# EAGLE board Glint module (rev A) - panelized 1x2 (EAGLE 6.4)
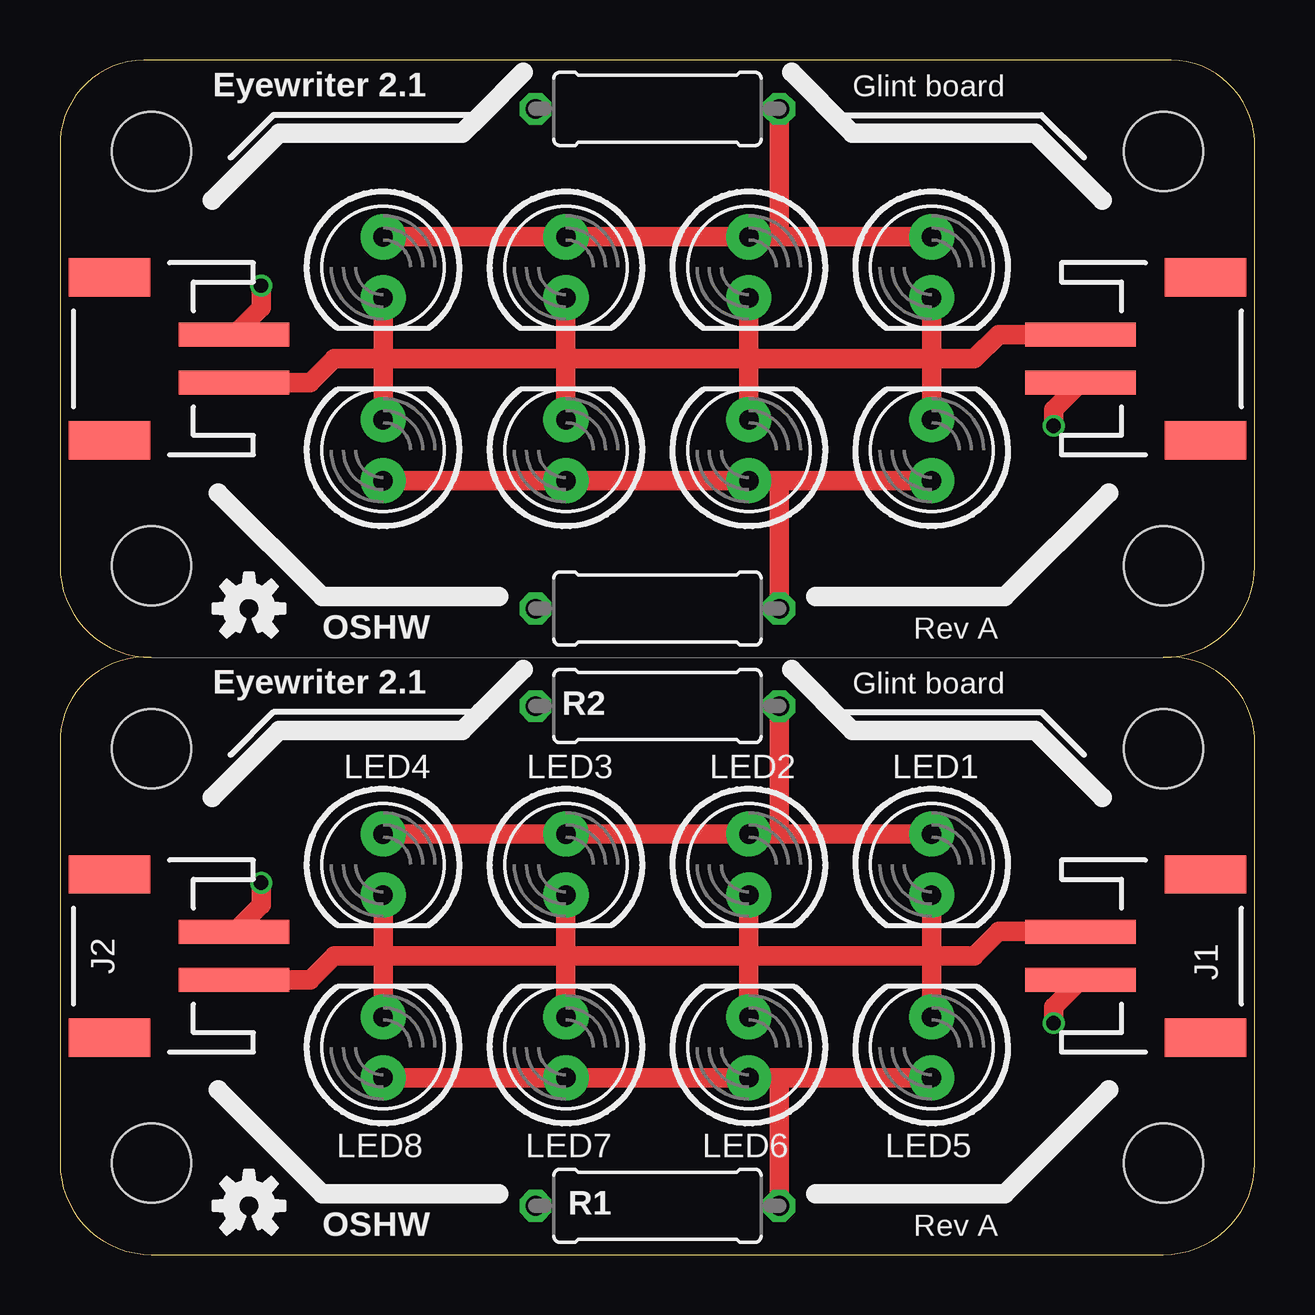
[diagram p0: board, top side]
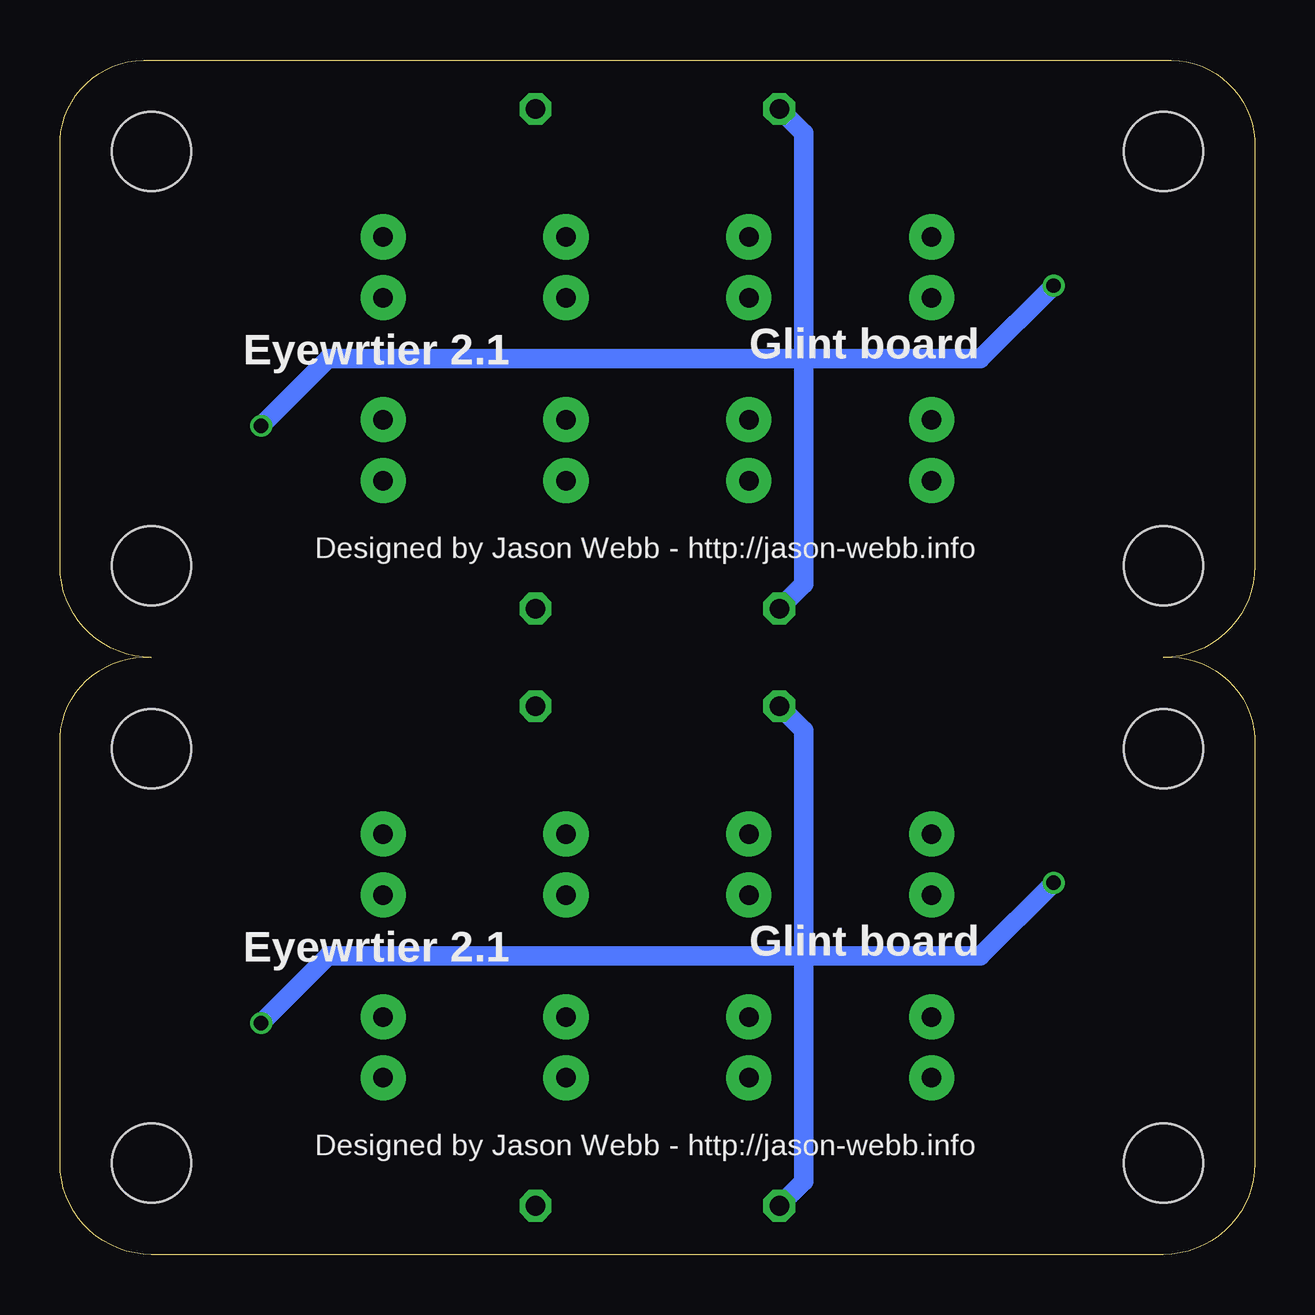
[diagram p1: board, bottom side, seen from below]

Size 49.78 x 49.79 mm. Coordinates in mm from the lower left corner, seen from the top.
Outline: 3.81,0 45.97,0 arc90 49.78,3.81 49.78,21.59 arc90 45.97,24.89 arc90 49.78,28.7 49.78,46.48 arc90 45.97,49.78 3.81,49.78 arc90 0,46.48 0,28.7 arc90 3.81,24.89 arc90 0,21.59 0,3.81 arc90 3.81,0
Copper layers (1*16): Top 0.035mm / dielectric 1.5mm / Bottom 0.035mm
Design rules "Fusion_eagle_rule_v1.1": minimum track width 6mil, minimum drill 12mil, track to track 6mil, track to pad 6mil, pad to pad 6mil, via to via 6mil, smd to smd 0mil, copper to edge 10mil, drill to drill 10mil, minimum pad ring 10mil, minimum via ring 6mil, stop-mask expansion 2mil, vias tented up to drill 100mil, thermal gap 10mil

## Footprints (pad centres in the part's own frame; a part is rotated, then mirrored left to right if it is on the bottom)
JST-2-SMD = smd 1 x 4.6: 1 -1,-3.7; 2 1,-3.7 | smd 1.6 x 3.4: NC1 -3.4,1.5; NC2 3.4,1.5
LED5MM = drill 0.813 pad 1.88: A -1.27,0; K 1.27,0
0309/10 = drill 0.813 octagon: 1 -5.08,0; 2 5.08,0
STAND-OFF = hole 3.302: 0,0

## Placement (x,y rotation side)
J1  [JST-2-SMD]  46.23,12.45 270 top
J2  [JST-2-SMD]  3.56,12.45 90 top
J3  [JST-2-SMD]  46.23,37.34 270 top
J4  [JST-2-SMD]  3.56,37.34 90 top
LED1  [LED5MM]  36.32,16.26 270 top
LED2  [LED5MM]  28.7,16.26 270 top
LED3  [LED5MM]  21.08,16.26 270 top
LED4  [LED5MM]  13.46,16.26 270 top
LED5  [LED5MM]  36.32,8.64 90 top
LED6  [LED5MM]  28.7,8.64 90 top
LED7  [LED5MM]  21.08,8.64 90 top
LED8  [LED5MM]  13.46,8.64 90 top
LED9  [LED5MM]  36.32,41.15 270 top
LED10  [LED5MM]  28.7,41.15 270 top
LED11  [LED5MM]  21.08,41.15 270 top
LED12  [LED5MM]  13.46,41.15 270 top
LED13  [LED5MM]  36.32,33.53 90 top
LED14  [LED5MM]  28.7,33.53 90 top
LED15  [LED5MM]  21.08,33.53 90 top
LED16  [LED5MM]  13.46,33.53 90 top
R1  39ohm  [0309/10]  24.89,2.03 180 top
R2  39ohm  [0309/10]  24.89,22.86 180 top
R3  39ohm  [0309/10]  24.89,26.92 180 top
R4  39ohm  [0309/10]  24.89,47.75 180 top
STANDOFF1  STAND-OFF  [STAND-OFF]  3.81,3.81 0 top
STANDOFF2  STAND-OFF  [STAND-OFF]  3.81,21.08 0 top
STANDOFF3  STAND-OFF  [STAND-OFF]  45.97,3.81 0 top
STANDOFF4  STAND-OFF  [STAND-OFF]  45.97,21.08 0 top
STANDOFF5  STAND-OFF  [STAND-OFF]  3.81,28.7 0 top
STANDOFF6  STAND-OFF  [STAND-OFF]  3.81,45.97 0 top
STANDOFF7  STAND-OFF  [STAND-OFF]  45.97,28.7 0 top
STANDOFF8  STAND-OFF  [STAND-OFF]  45.97,45.97 0 top
U$1  [OSHW-LOGO-S]  7.87,2.03 0 top
U$2  [OSHW-LOGO-S]  7.87,26.92 0 top

## Library data of the parts
J1-J4 = SparkFun-Connectors; PROD_ID: CONN-08352
LED1-LED16 = SparkFun-LED
R1-R4 = resistor
STANDOFF1-STANDOFF8 = SparkFun-Electromechanical
U$1 U$2 = SparkFun-Aesthetics

## Nets
+5V: J1.2 J2.2 R1.2 R2.2
+5V1: J3.2 J4.2 R3.2 R4.2
GND: J1.1 J2.1 LED1.K LED2.K LED3.K LED4.K LED5.K LED6.K LED7.K LED8.K
GND1: J3.1 J4.1 LED9.K LED10.K LED11.K LED12.K LED13.K LED14.K LED15.K LED16.K
N$1: LED1.A LED2.A LED3.A LED4.A R2.1
N$2: LED9.A LED10.A LED11.A LED12.A R4.1
N$3: LED5.A LED6.A LED7.A LED8.A R1.1
N$4: LED13.A LED14.A LED15.A LED16.A R3.1

## Tracks (layer width: path | path; a pad name or v marks a point on that pad's centre or on a via)
+5V  (via drill 0.6)
  Top 0.813: J1.2 41.4,10.32 v41.4,9.65 | v8.38,15.49 8.38,14.57 J2.2
  Bottom 0.813: v41.4,9.65 38.61,12.45 18.8,12.45 | 18.8,12.45 11.43,12.45 v8.38,15.49 | R2.2 18.8,21.84 18.8,12.45 | R1.2 18.8,3.05 18.8,12.45
+5V1  (via drill 0.6)
  Top 0.813: J3.2 41.4,35.21 v41.4,34.54 | v8.38,40.39 8.38,39.46 J4.2
  Bottom 0.813: v41.4,34.54 38.61,37.34 18.8,37.34 | 18.8,37.34 11.43,37.34 v8.38,40.39 | R4.2 18.8,46.74 18.8,37.34 | R3.2 18.8,27.94 18.8,37.34
GND
  Top 0.813: J2.1 10.43,11.45 11.43,12.45 13.21,12.45 | 13.21,12.45 13.72,12.45 | 13.72,12.45 21.08,12.45 | 21.08,12.45 28.45,12.45 | 28.45,12.45 28.7,12.45 | 28.7,12.45 36.32,12.45 | 36.32,12.45 38.1,12.45 39.12,13.46 42.51,13.46 J1.1 | LED1.K 36.32,12.45 | LED2.K 28.7,12.7 28.45,12.45 | LED3.K 21.08,12.45 | LED4.K 13.46,12.7 13.21,12.45 | LED8.K 13.46,12.19 13.72,12.45 | LED7.K 21.08,12.45 | LED6.K 28.7,12.45 | LED5.K 36.32,12.45
GND1
  Top 0.813: J4.1 10.43,36.34 11.43,37.34 13.21,37.34 | 13.21,37.34 13.72,37.34 | 13.72,37.34 21.08,37.34 | 21.08,37.34 28.45,37.34 | 28.45,37.34 28.7,37.34 | 28.7,37.34 36.32,37.34 | 36.32,37.34 38.1,37.34 39.12,38.35 42.51,38.35 J3.1 | LED9.K 36.32,37.34 | LED10.K 28.7,37.59 28.45,37.34 | LED11.K 21.08,37.34 | LED12.K 13.46,37.59 13.21,37.34 | LED16.K 13.46,37.08 13.72,37.34 | LED15.K 21.08,37.34 | LED14.K 28.7,37.34 | LED13.K 36.32,37.34
N$1
  Top 0.813: LED4.A LED3.A LED2.A 29.97,17.53 | 29.97,17.53 LED1.A | R2.1 29.97,17.53
N$2
  Top 0.813: LED12.A LED11.A LED10.A 29.97,42.42 | 29.97,42.42 LED9.A | R4.1 29.97,42.42
N$3
  Top 0.813: LED8.A LED7.A LED6.A 29.97,7.37 | 29.97,7.37 LED5.A | R1.1 29.97,7.37
N$4
  Top 0.813: LED16.A LED15.A LED14.A 29.97,32.26 | 29.97,32.26 LED13.A | R3.1 29.97,32.26

## Text on the board
tPlace: Eyewriter 2.1 | Glint board | OSHW | Rev A | Eyewriter 2.1 | Glint board | OSHW | Rev A
bPlace: Glint board | Eyewrtier 2.1 | Designed by Jason Webb - http://jason-webb.info | Glint board | Eyewrtier 2.1 | Designed by Jason Webb - http://jason-webb.info
tDocu: R2 | LED4 | LED3 | LED2 | LED1 | J1 | J2 | LED8 | LED7 | LED6 | LED5 | R1